# EAGLE board smart_cart (EAGLE 8.4.1)
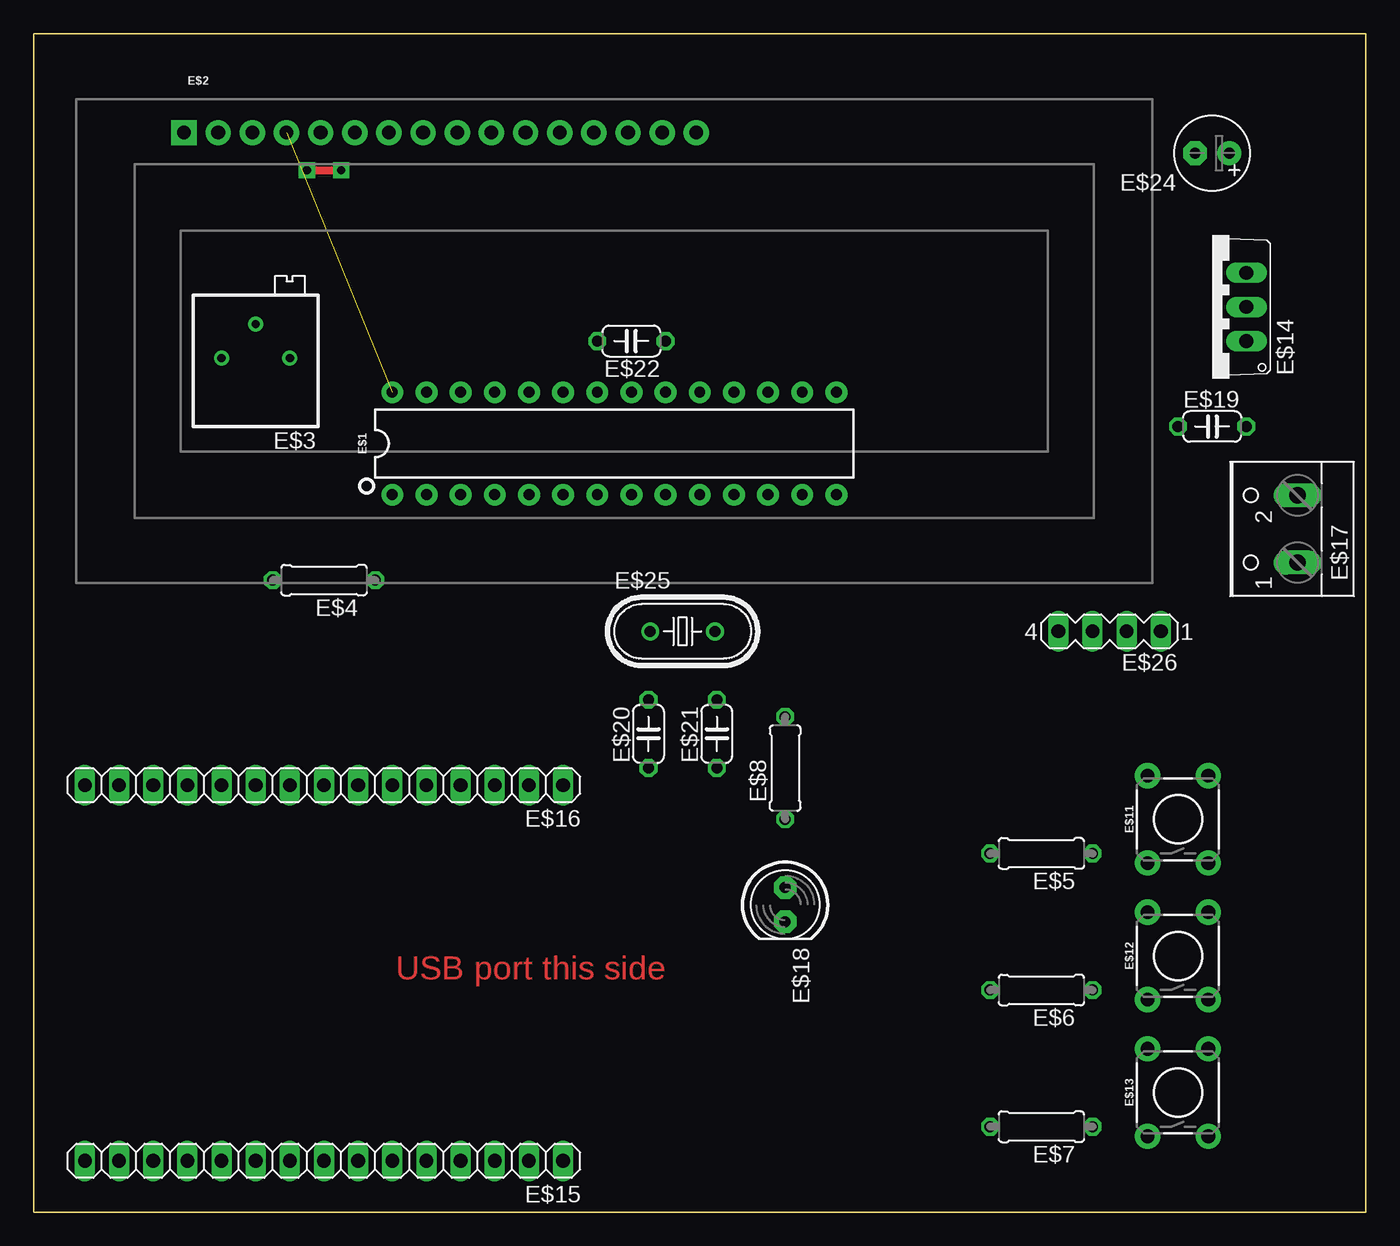
[diagram p0: board, top side]
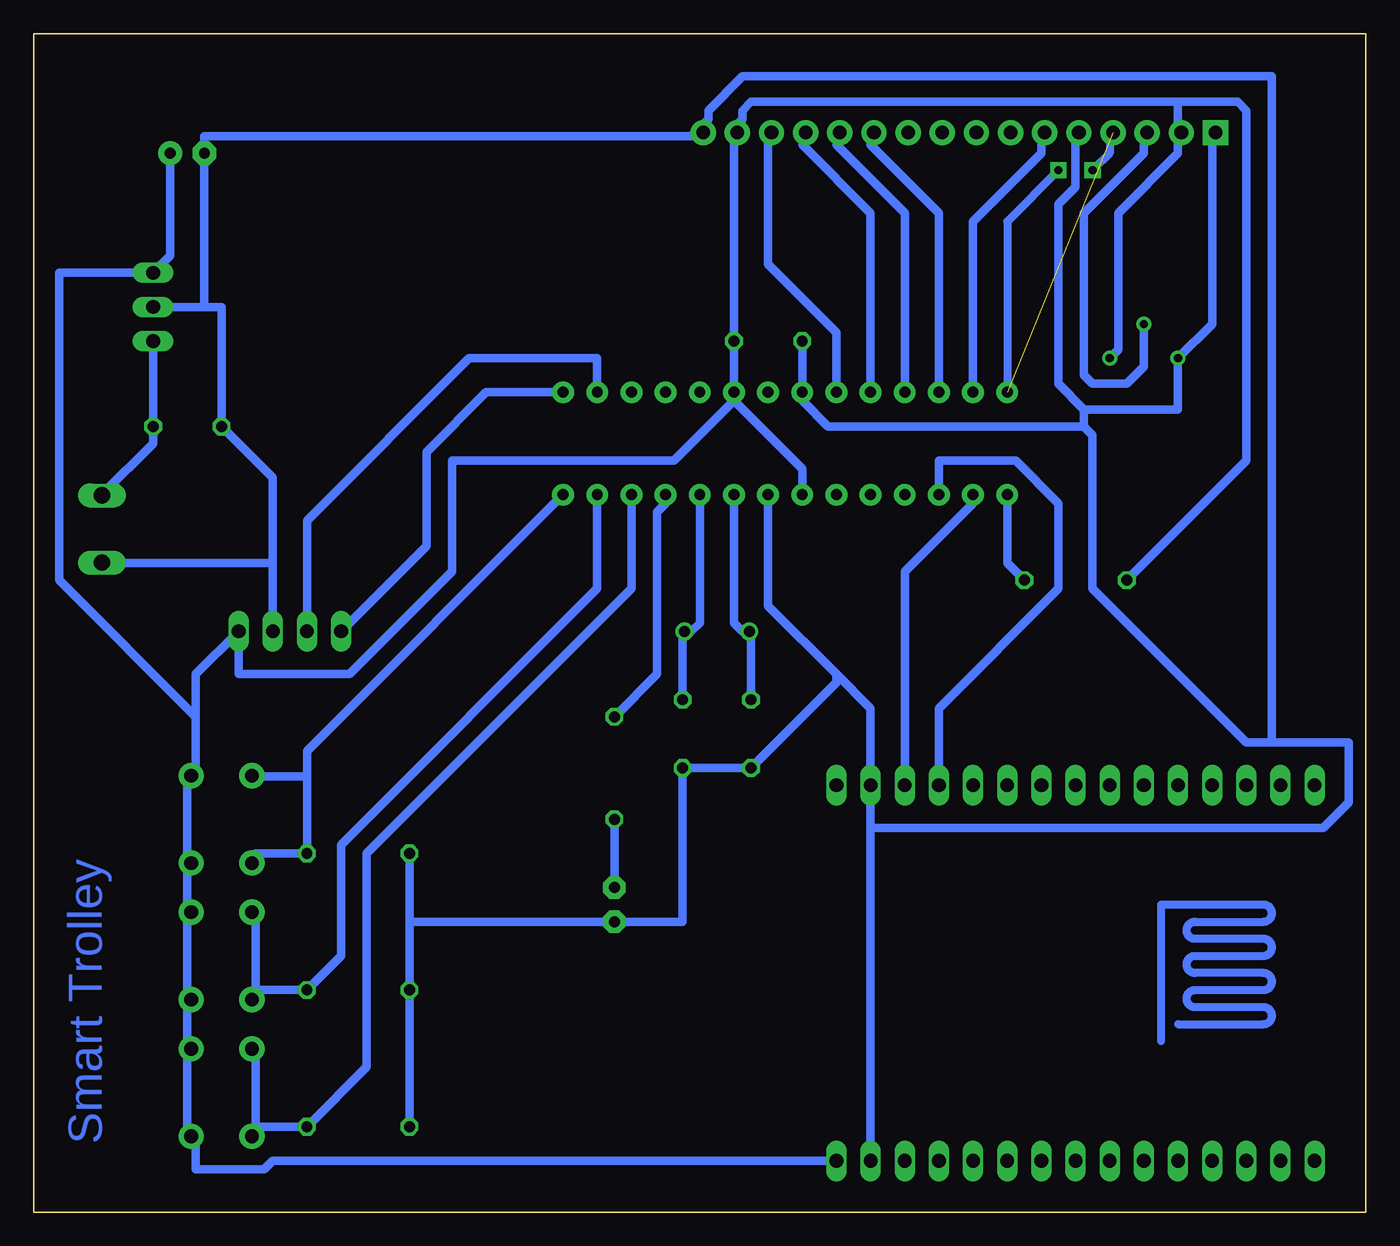
[diagram p1: board, bottom side, seen from below]

Size 99.06 x 87.63 mm. Coordinates in mm from the lower left corner, seen from the top.
Outline: 0,0 99.06,0 99.06,87.63 0,87.63 0,0
Copper layers (1*16): Top 0.035mm / dielectric 1.5mm / Bottom 0.035mm
Design rules "default *": minimum track width 25mil, minimum drill 0.35mm, track to track 40mil, track to pad 40mil, pad to pad 6mil, via to via 6mil, smd to smd 6mil, copper to edge 40mil, drill to drill 6mil, minimum pad ring 10mil, minimum via ring 8mil, stop-mask expansion 4mil, vias tented up to drill 0mil, thermal gap 10mil

## Footprints (pad centres in the part's own frame; a part is rotated, then mirrored left to right if it is on the bottom)
DIP28 = drill 0.813 pad 1.626: 1 -16.51,-3.81; 2 -13.97,-3.81; 3 -11.43,-3.81; 4 -8.89,-3.81; 5 -6.35,-3.81; 6 -3.81,-3.81; 7 -1.27,-3.81; 8 1.27,-3.81; 9 3.81,-3.81; 10 6.35,-3.81; 11 8.89,-3.81; 12 11.43,-3.81; 13 13.97,-3.81; 14 16.51,-3.81; 15 16.51,3.81; 16 13.97,3.81; 17 11.43,3.81; 18 8.89,3.81; 19 6.35,3.81; 20 3.81,3.81; 21 1.27,3.81; 22 -1.27,3.81; 23 -3.81,3.81; 24 -6.35,3.81; 25 -8.89,3.81; 26 -11.43,3.81; 27 -13.97,3.81; 28 -16.51,3.81
LCD-16X2_NOHOLESNOSILK = drill 1.016 pad 1.88 square: 1 -32,15.5 | drill 1.016 pad 1.88: 2 -29.46,15.5; 3 -26.92,15.5; 4 -24.38,15.5; 5 -21.84,15.5; 6 -19.3,15.5; 7 -16.76,15.5; 8 -14.22,15.5; 9 -11.68,15.5; 10 -9.14,15.5; 11 -6.6,15.5; 12 -4.06,15.5; 13 -1.52,15.5; 14 1.02,15.5; 15 3.56,15.5; 16 6.1,15.5
RTRIM3296P = drill 0.61: 1 0,-2.54; 2 2.54,0; 3 0,2.54
0207/7 = drill 0.813 octagon: 1 -3.81,0; 2 3.81,0
TACTILE_SWITCH_PTH_6.0MM = drill 1.016 pad 1.88: 1 -3.251,2.261; 2 3.251,2.261; 3 -3.251,-2.261; 4 3.251,-2.261
TO220V = drill 1.016 long: 1 -2.54,-2.54; 2 0,-2.54; 3 2.54,-2.54
1X15 = drill 1.016 long: 1 -17.78,0; 2 -15.24,0; 3 -12.7,0; 4 -10.16,0; 5 -7.62,0; 6 -5.08,0; 7 -2.54,0; 8 0,0; 9 2.54,0; 10 5.08,0; 11 7.62,0; 12 10.16,0; 13 12.7,0; 14 15.24,0; 15 17.78,0
W237-102 = drill 1.194 long: 1 -2.5,-1.27; 2 2.5,-1.27
LED5MM = drill 0.813 pad 1.676 octagon: A -1.27,0; K 1.27,0
C050-024X044 = drill 0.813 octagon: 1 -2.54,0; 2 2.54,0
E2,5-6 = drill 0.813 pad 1.778: + -1.27,0 | drill 0.813 pad 1.778 octagon: - 1.27,0
HC49U70 = drill 0.813: 1 -2.413,0; 2 2.413,0
MA04-1 = drill 1.016 long: 1 -3.81,0; 2 -1.27,0; 3 1.27,0; 4 3.81,0

## Placement (x,y rotation side)
E$1  [DIP28]  43.18,57.15 0 top
E$2  [LCD-16X2_NOHOLESNOSILK]  43.18,64.77 0 top
E$3  [RTRIM3296P]  16.51,63.5 90 top
E$4  [0207/7]  21.59,46.99 180 top
E$5  [0207/7]  74.93,26.67 180 top
E$6  [0207/7]  74.93,16.51 180 top
E$7  [0207/7]  74.93,6.35 180 top
E$8  [0207/7]  55.88,33.02 90 top
E$11  [TACTILE_SWITCH_PTH_6.0MM]  85.09,29.21 90 top
E$12  [TACTILE_SWITCH_PTH_6.0MM]  85.09,19.05 90 top
E$13  [TACTILE_SWITCH_PTH_6.0MM]  85.09,8.89 90 top
E$14  [TO220V]  87.63,67.31 90 top
E$15  [1X15]  21.59,3.81 180 top
E$16  [1X15]  21.59,31.75 180 top
E$17  [W237-102]  92.71,50.8 90 top
E$18  [LED5MM]  55.88,22.86 270 top
E$19  [C050-024X044]  87.63,58.42 0 top
E$20  [C050-024X044]  45.72,35.56 90 top
E$21  [C050-024X044]  50.8,35.56 90 top
E$22  [C050-024X044]  44.45,64.77 180 top
E$24  [E2,5-6]  87.63,78.74 180 top
E$25  [HC49U70]  48.26,43.18 0 top
E$26  [MA04-1]  80.01,43.18 180 top

## Library data of the parts
E$1 = SparkFun-IC-Microcontroller
E$2 = SparkFun-Displays
E$3 = rcl
E$4-E$8 E$14-E$16 E$18-E$22 E$24 E$25 = adafruit
E$11-E$13 = SparkFun-Switches
E$17 = con-wago-500
E$26 = con-lstb

## Nets
S$1: E$1.11 E$8.2
S$2: E$2.3 E$3.2
S$3: E$8.1 E$18.A
S$5: E$1.27 E$2.6
S$6: E$1.26 E$2.11
S$7: E$1.25 E$2.12
S$8: E$1.24 E$2.13
S$9: E$1.23 E$2.14
S$10: E$1.15 E$26.4
S$11: E$1.3 E$16.4
S$12: E$1.1 E$4.1
S$13: E$1.8 E$1.22 E$2.1 E$2.5 E$2.16 E$3.3 E$5.2 E$6.2 E$7.2 E$14.2 E$15.2 E$16.2 E$17.1 E$18.K E$19.1 E$20.1 E$21.1 E$22.2 E$24.- E$26.2
S$14: E$1.16 E$26.3
S$17: E$1.14 E$5.1 E$11.1 E$11.2
S$18: E$1.13 E$6.1 E$12.1 E$12.2
S$19: E$1.12 E$7.1 E$13.1 E$13.2
S$20: E$14.1 E$17.2 E$19.2
S$21: E$1.28 E$2.4
S$22: E$1.7 E$1.20 E$2.2 E$2.15 E$3.1 E$4.2 E$11.3 E$11.4 E$12.3 E$12.4 E$13.3 E$13.4 E$14.3 E$15.1 E$22.1 E$24.+ E$26.1
S$23: E$1.9 E$20.2 E$25.1
S$24: E$1.10 E$21.2 E$25.2
S$26: E$1.2 E$16.3

## Tracks (layer width: path | path; a pad name or v marks a point on that pad's centre or on a via)
S$1
  Bottom 0.635: E$8.2 52.7,40 52.7,52.07 52.07,52.7 E$1.11
S$2
  Bottom 0.635: E$3.2 16.51,62.86 17.78,61.59 20.32,61.59 20.96,62.23 20.96,74.3 16.51,78.74 16.51,80.01 E$2.3
S$3
  Bottom 0.635: E$18.A E$8.1
S$4
  Bottom 0.61: 13.97,13.97 7.62,13.97 arc-180 7.62,15.24 12.7,15.24 arc180 12.7,16.51 7.62,16.51 arc-180 7.62,17.78 12.7,17.78 arc180 12.7,19.05 7.62,19.05 arc-180 7.62,20.32 12.7,20.32 arc180 12.7,21.59 7.62,21.59 arc-180 7.62,22.86 15.24,22.86 15.24,12.7
S$5
  Bottom 0.635: E$1.27 29.21,73.66 24.13,78.74 24.13,80.01 E$2.6
S$6
  Bottom 0.635: E$1.26 31.75,74.3 36.83,79.38 36.83,80.01 E$2.11
S$7
  Bottom 0.635: E$1.25 34.29,74.3 39.37,79.38 39.37,80.01 E$2.12
S$8
  Bottom 0.635: E$1.24 36.83,74.3 41.91,79.38 41.91,80.01 E$2.13
S$9
  Bottom 0.635: E$1.23 39.37,65.41 44.45,70.48 44.45,80.01 E$2.14
S$10
  Bottom 0.635: E$26.4 69.85,49.53 69.85,56.52 65.4,60.96 E$1.15
S$11
  Bottom 0.635: E$16.4 31.75,37.47 22.86,46.36 22.86,52.7 26.04,55.88 31.75,55.88 E$1.3
S$12
  Bottom 0.635: E$4.1 26.67,48.26 E$1.1
S$13
  Bottom 0.635: E$26.2 81.28,48.26 | 81.28,48.26 81.28,54.61 E$19.1 85.09,67.31 86.36,67.31 | 86.36,67.31 E$14.2 | 86.36,67.31 E$24.- 86.36,80.01 49.53,80.01 E$2.16 49.53,80.64 48.9,81.28 48.9,81.92 46.36,84.45 6.99,84.45 6.99,34.92 | 81.28,48.26 93.98,48.26 E$17.1 | E$22.2 E$1.22 41.91,60.33 40.01,58.42 20.96,58.42 | E$2.1 11.43,80.01 11.43,66.04 E$3.3 13.97,59.69 20.96,59.69 | 20.96,59.69 22.86,61.59 22.86,74.93 21.59,76.2 21.59,80.01 E$2.5 | 20.96,59.69 20.96,58.42 | E$7.2 E$6.2 71.12,21.59 | 71.12,21.59 E$5.2 | 71.12,21.59 E$18.K 50.8,21.59 E$21.1 E$20.1 39.37,39.37 39.37,40 | 36.83,28.57 E$16.2 36.83,37.47 39.37,40 | 36.83,28.57 E$15.2 | E$1.8 44.45,45.09 39.37,40 | 20.96,58.42 20.32,57.78 20.32,46.36 8.89,34.92 6.99,34.92 | 6.99,34.92 1.27,34.92 1.27,30.48 3.17,28.57 36.83,28.57
S$14
  Bottom 0.635: E$26.3 78.74,51.44 66.67,63.5 57.15,63.5 E$1.16
S$17
  Bottom 0.635: E$11.1 82.55,26.04 82.55,26.67 E$5.1 78.74,32.38 | E$1.14 78.74,34.29 78.74,32.38 | 78.74,32.38 82.55,32.38 E$11.2
S$18
  Bottom 0.635: 82.55,16.51 E$6.1 76.2,19.05 76.2,27.3 57.15,46.36 E$1.13 | 82.55,16.51 82.55,15.88 E$12.1 82.55,16.51 | 82.55,16.51 82.55,22.23 E$12.2
S$19
  Bottom 0.635: 82.55,6.35 E$7.1 74.29,10.79 74.29,26.67 54.61,46.36 E$1.12 | 82.55,6.35 82.55,5.71 E$13.1 82.55,6.35 | 82.55,6.35 82.55,12.06 E$13.2
S$20
  Bottom 0.635: E$14.1 E$19.2 90.17,57.15 93.98,53.34 E$17.2
S$21  (via drill 0.6 pad 1.2)  (1 unrouted)
  Top 0.61: v20.32,77.47 v22.86,77.47
  Bottom 0.61: 19.05,80.01 19.05,78.74 v20.32,77.47 | v22.86,77.47 26.67,73.66 E$1.28
S$22
  Bottom 0.635: E$1.7 41.91,55.25 46.99,60.33 | E$3.1 18.41,64.14 18.41,74.3 13.97,78.74 13.97,80.01 E$2.2 13.97,80.64 13.97,82.55 | E$4.2 8.89,55.88 8.89,81.92 9.52,82.55 13.97,82.55 | 13.97,82.55 45.72,82.55 46.36,81.92 46.36,81.28 46.99,80.64 E$2.15 46.99,80.01 E$22.1 E$1.20 46.99,60.33 | E$24.+ 88.9,71.12 E$14.3 97.15,69.85 97.15,46.99 86.99,36.83 | 86.99,36.83 86.99,33.02 E$11.4 87.63,32.38 87.63,26.04 E$11.3 87.63,25.4 87.63,22.86 E$12.4 87.63,22.23 87.63,15.88 E$12.3 87.63,15.24 87.63,12.7 E$13.4 87.63,12.06 87.63,5.71 E$13.3 86.99,5.08 86.99,3.18 81.91,3.18 81.28,3.81 E$15.1 | 86.99,36.83 86.99,40 E$26.1 83.82,40 75.56,40 67.94,47.62 67.94,55.88 51.44,55.88 46.99,60.33
S$23
  Bottom 0.635: E$20.2 45.72,43.18 E$25.1 46.36,43.18 46.99,43.81 E$1.9
S$24
  Bottom 0.635: E$21.2 50.8,43.18 E$25.2 50.16,43.18 49.53,43.81 E$1.10
S$26
  Bottom 0.635: E$16.3 34.29,47.62 29.21,52.7 E$1.2

## Text on the board
Top: USB port this side
Bottom: Smart Trolley